# Altium PCB SINGLE_BOARD.PcbDoc
Units mm, origin at the board's own origin, x right, y up, seen from the top; angles counter-clockwise.
Board outline 48.01 x 205.2 mm, 4 copper layers (Top Layer 1, PWR, GND_LAYER, Bottom Layer), stack 0.602 mm thick; 33 components, 61 nets, 219 pads, 45 vias.
Unrouted connection lines stored in the file: 1.
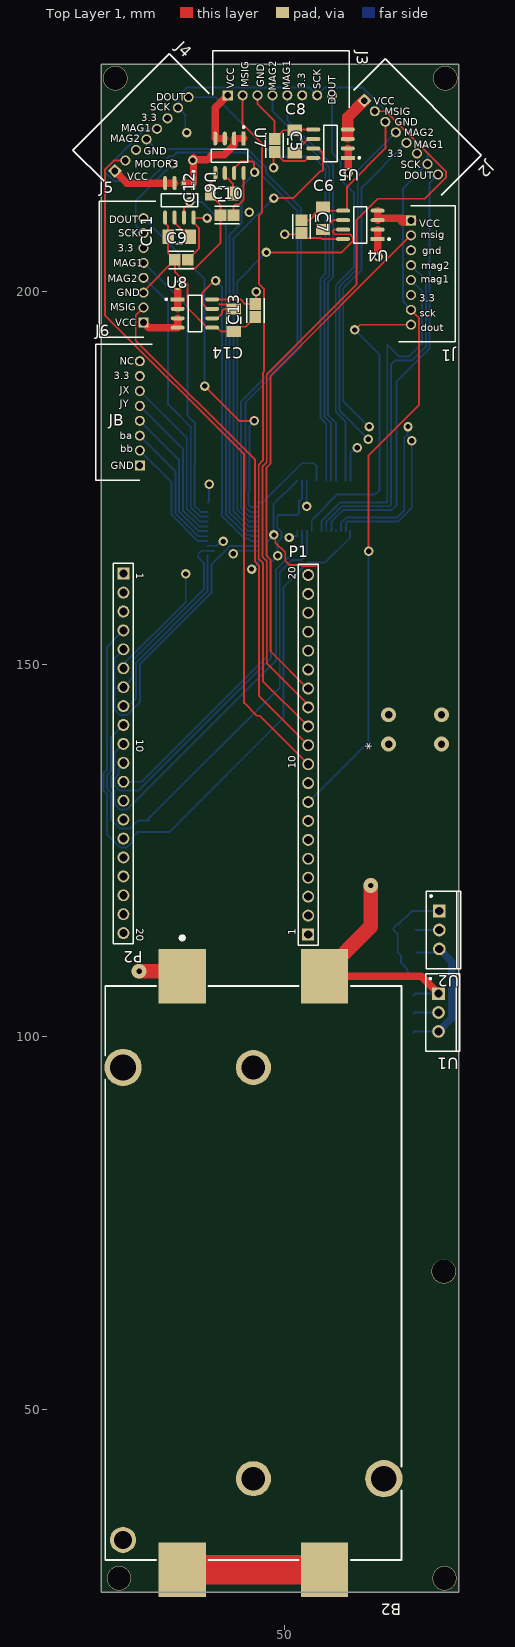
[diagram p0: Top Layer 1 view]
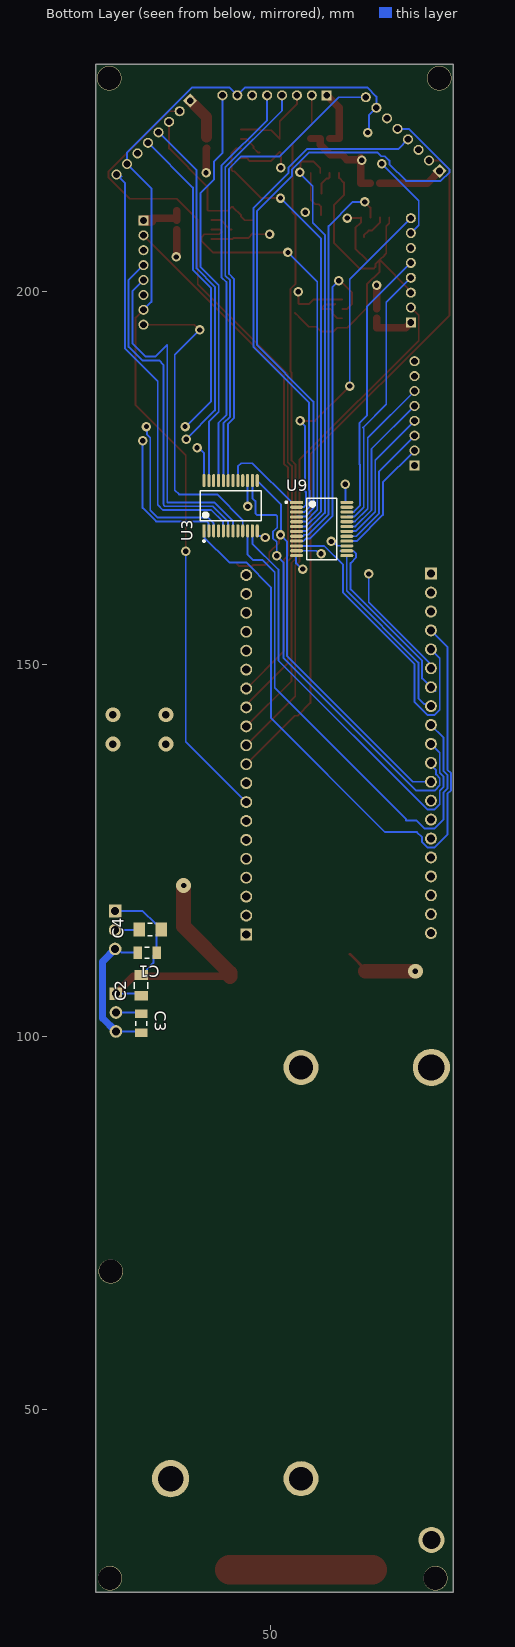
[diagram p1: Bottom Layer view, seen from below]
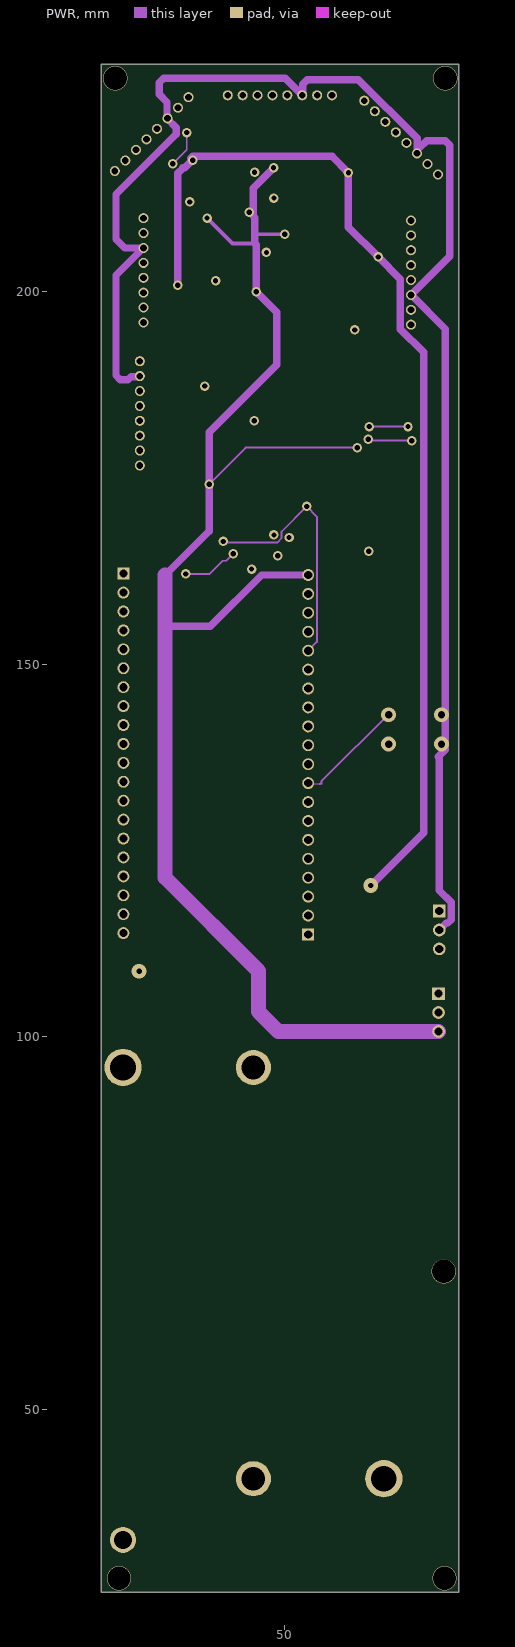
[diagram p2: PWR]
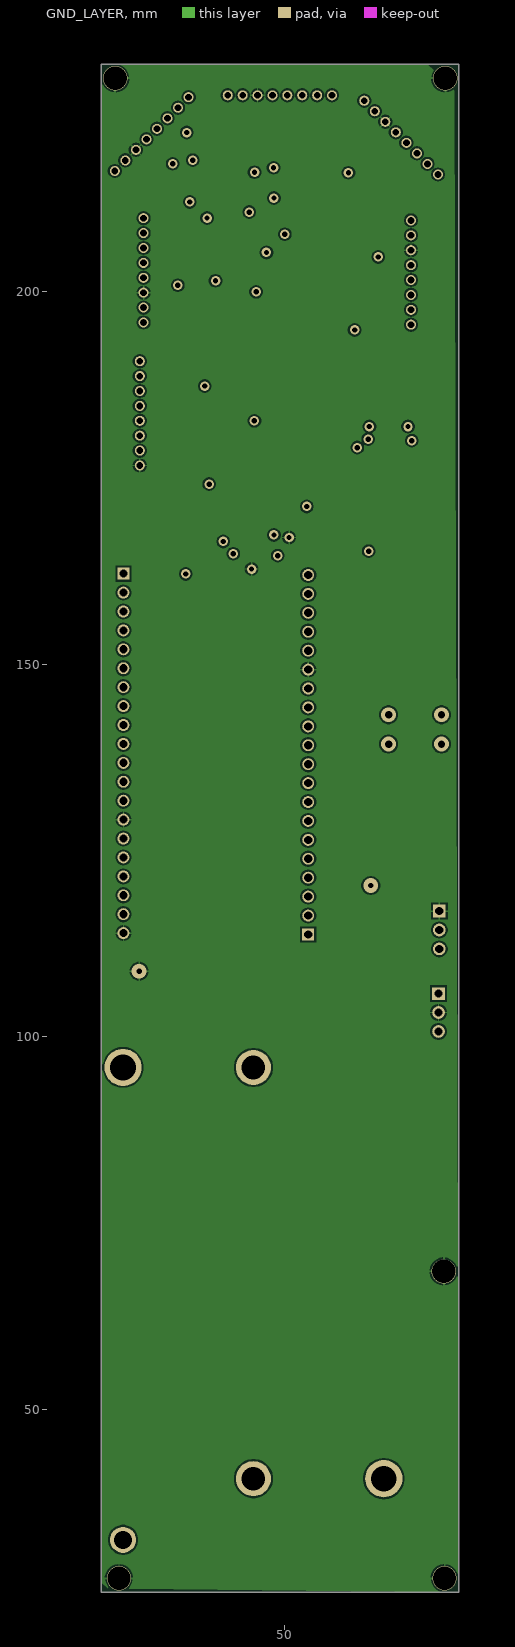
[diagram p3: GND_LAYER]
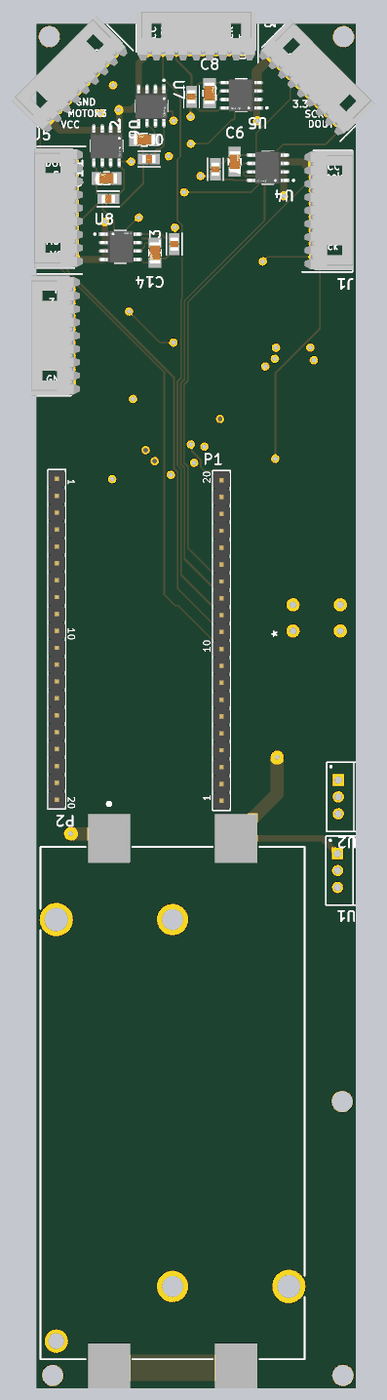
[diagram p4: 3D render of the assembled board from above, using the file's embedded part models]
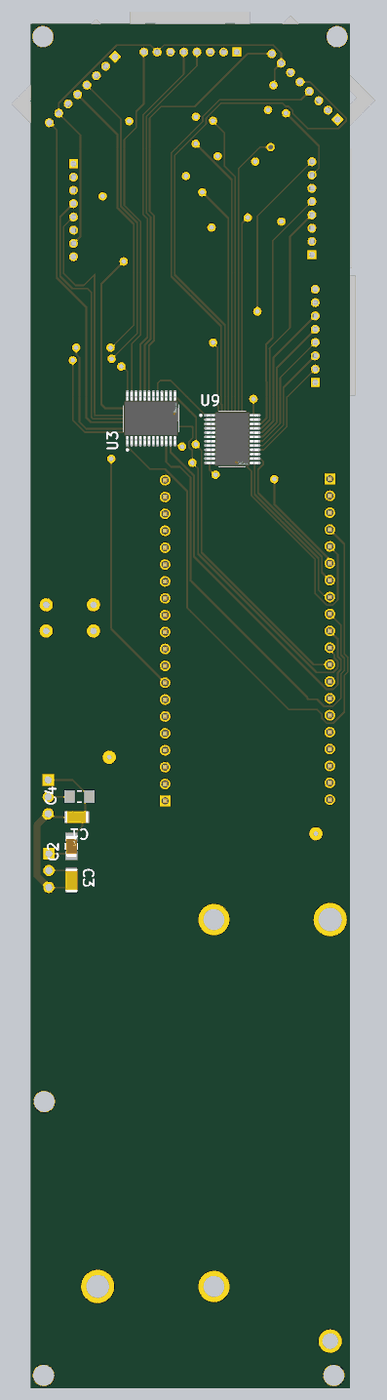
[diagram p5: 3D render of the assembled board from below, using the file's embedded part models]

## Layer stack, top to bottom
Top Solder: solder mask 0.0102, Solder Resist, Dk 3.5
Top Layer 1: signal copper 0.035
Dielectric 2: prepreg 0.0711, PP-006, Dk 4.1
PWR: signal copper 0.035
Dielectric 3: prepreg 0.0711, PP-006, Dk 4.1
GND_LAYER: signal copper 0.035
Dielectric 1: dielectric 0.32, FR-4, Dk 4.8
Bottom Layer: signal copper 0.035
Bottom Solder: solder mask 0.0102, Solder Resist, Dk 3.5

## Board outline
25.4,25.4 73.406,25.4 73.406,230.6 25.4,230.6

## Design rules (kind name [scope] priority, off if disabled: settings)
Clearance [All] p1: gap=0.254 ignorepadtopadclearanceinfootprint=FALSE except(0: Arc-Hole Track-Hole SMDPad-Hole THPad-Hole Via-Hole Fill-Hole Poly-Hole Region-Hole Text-Hole)
PolygonConnect [All] p1: connectstyle=Relief reliefconductorwidth=0.254 reliefentries=4 polygonreliefangle="90 Angle" airgapwidth=0.254
RoomDefinition U_power_esp32 [InComponentClass('U_power_esp32')] p1: confinementstyle=ConfineIn formatcopy=TRUE lockcomponents=FALSE outline 74.5,26.9 81,26.9 81,38.6 74.5,38.6
RoomDefinition "U_PIN HEADERS" [InComponentClass('U_PIN HEADERS')] p2: confinementstyle=ConfineIn formatcopy=TRUE lockcomponents=FALSE outline 0,0 50.8,0 50.8,25.4 0,25.4
RoomDefinition U_tactile_power [InComponentClass('U_tactile_power')] p3: confinementstyle=ConfineIn formatcopy=TRUE lockcomponents=FALSE outline 25.4,25.1 75,25.1 75,121 25.4,121
RoutingVias [All] p1: holewidth=0.711 width=1.27 viastyle="Through Hole" minholewidth=0.711 minwidth=1.27 maxholewidth=0.711 maxwidth=1.27
SolderMaskExpansion [All] p1: expansion=0.102 istentingtop=FALSE
Width [All] p1: maxlimit=4 minlimit=0.254 preferedwidth=0.254 bottomlayer_maxwidth=1 minimp=50.000000 maximp=50.000000 favimp=50.000000
30 further rules are at their usual default settings.

## Classes and differential pairs
component class U_tactile_power: B2 C1 C2 C3 C4 U1 U2
component class "U_PIN HEADERS": C5 C6 C7 C8 C9 C10 C11 C12 C13 C14 J1 J2 J3 J4 J5 J6 U4 U5 U6 U7 U8
component class U_power_esp32: * P1 P2 U3 U9

## Components (designator, comment, footprint, x,y, rotation, side; value= is the part's Value field where it differs from the comment)
* "12.5mm button" "12.5mm button-Footprint-1" 71.1,139.3 r90 top
B2 "1048" 1048 28.342,95.885 r270 top
C1 "GRM31C5C1E104JA01L" CAPC3216X180X55LL20T25 66.5,111.3 r0 bottom
C2 "330nf" FP-1206-L_3_2_0_2-W_1_6_0-IPC_B 67.3,106.9 r90 bottom
C3 "GRM31C5C1E104JA01L" CAPC3216X180X55LL20T25 67.3,101.8 r270 bottom
C4 "GRM31CR61E106KA12L" CAPC3216X180X55ML20T25 66.1,114.4 r0 bottom
C5 "C2012X5R1E105K125AA" FP-C2012-125-0_2-IPC_A 48.7,219.664 r270 top
C6 "12065C472KAT2A" FP-1206-L_3_2_0_2-W_1_6_0-IPC_A 55.2,209.9 r90 top
C7 "C2012X5R1E105K125AA" FP-C2012-125-0_2-IPC_A 52.3,208.764 r270 top
C8 "12065C472KAT2A" FP-1206-L_3_2_0_2-W_1_6_0-IPC_A 51.4,220.2 r90 top
C9 "C2012X5R1E105K125AA" FP-C2012-125-0_2-IPC_A 36.164,204.3 r0 top
C10 "C2012X5R1E105K125AA" FP-C2012-125-0_2-IPC_A 42.3,210.3 r0 top
C11 "12065C472KAT2A" FP-1206-L_3_2_0_2-W_1_6_0-IPC_A 35.901,207.4 r180 top
C12 "12065C472KAT2A" FP-1206-L_3_2_0_2-W_1_6_0-IPC_A 41.6,213.2 r180 top
C13 "C2012X5R1E105K125AA" FP-C2012-125-0_2-IPC_A 46.1,197.5 r90 top
C14 "12065C472KAT2A" FP-1206-L_3_2_0_2-W_1_6_0-IPC_A 43.2,196.2 r270 top
J1 "53254-0870" SHDRRA8W50P0X200_1X8_1800X730X440P 67,209.6 r270 top
J2 "53254-0870" SHDRRA8W50P0X200_1X8_1800X730X440P 60.729,225.671 r315 top
J3 "53254-0870" SHDRRA8W50P0X200_1X8_1800X730X440P 42.4,226.4 r0 top
J4 "53254-0870" SHDRRA8W50P0X200_1X8_1800X730X440P 27.243,216.243 r45 top
J5 "53254-0870" SHDRRA8W50P0X200_1X8_1800X730X440P 31.1,195.9 r90 top
J6 "53254-0870" SHDRRA8W50P0X200_1X8_1800X730X440P 30.6,176.7 r90 top
P1 "61302011121" 61302011121 53.2,137.87 r90 top
P2 "61302011121" 61302011121 28.4,138.05 r270 top
U1 "L7805CV" TO220 70.7,103.26 r270 top
U2 "LD1117V33" TO220 70.8,114.34 r270 top
U3 "CD74HC4067SM96" FP-DB0024A-IPC_C 55.3,171.3 r90 bottom
U4 "ACS724LLCTR-05AB-T" FP-LCN-8-IPC_C 60.2,209 r180 top
U5 "ACS724LLCTR-05AB-T" FP-LCN-8-IPC_C 56.2,219.9 r180 top
U6 "ACS724LLCTR-05AB-T" FP-LCN-8-IPC_C 35.9,212.3 r270 top
U7 "ACS724LLCTR-05AB-T" FP-LCN-8-IPC_C 42.635,218.284 r270 top
U8 "ACS724LLCTR-05AB-T" FP-LCN-8-IPC_C 38,197.1 r0 top
U9 "CD74HC4067SM96" FP-DB0024A-IPC_C 43.075,168.175 r180 bottom

## Footprints (in the part's own frame and the unit in brackets; to place one, negate y for a bottom-side part, rotate by r counter-clockwise, add the part's x,y. Pads: shape width x height; smd on the part's side, far side on the other; paste and mask are expansions set on the pad)
"12.5mm button-Footprint-1" [mm]
1048 [mm]
  rect 7.34x6.35 smd: 1(-12.225,7.95) 2(67.425,7.95) 3(67.425,27.06) 4(-12.225,27.06)
  round 4.7 hole 3.17: 5(0,17.505) 7(55.2,17.505)
  round 5 hole 3.54: 6(0,0)
  round 3.5 hole 2.39: 8(63.42,0)
  round 5 hole 3.45: 9(55.2,35.01)
  silkscreen extent -17.62,-2.38 66.13,37.4
61302011121 [mm] "Pin Header, pitch 2.54 mm, THT, Vertical, single row, 20p"
  rect 1.6x1.6 hole 1.1: 1(-24.13,0)
  round 1.6 hole 1.1: 2(-21.59,0) 3(-19.05,0) 4(-16.51,0) 5(-13.97,0) 6(-11.43,0) 7(-8.89,0) 8(-6.35,0) 9(-3.81,0) 10(-1.27,0) 11(1.27,0) 12(3.81,0) 13(6.35,0) 14(8.89,0) 15(11.43,0) 16(13.97,0) 17(16.51,0) 18(19.05,0) 19(21.59,0) 20(24.13,0)
  silkscreen extent -25.55,-1.35 25.55,1.35, body extent -25.4,-1.27 25.4,1.27, height 8.57
CAPC3216X180X55LL20T25 [mm] "Chip Capacitor, 2-Leads, Body 3.4x1.8mm, IPC High Density"
  rect 1.15x1.7 smd: 1(-1.275,0) 2(1.275,0)
  silkscreen extent -0.3,-0.75 0.3,0.75, body extent -1.7,-0.9 1.7,0.9, height 1.8
CAPC3216X180X55ML20T25 [mm] "Chip Capacitor, 2-Leads, Body 3.4x1.8mm, IPC Low Density"
  rect 1.55x1.9 smd: 1(-1.475,0) 2(1.475,0)
  silkscreen extent -0.3,-0.85 0.3,0.85, body extent -1.7,-0.9 1.7,0.9, height 1.8
FP-1206-L_3_2_0_2-W_1_6_0-IPC_A [mm]
  rect 1.505x1.906 smd paste+0 mask+0: 1(-1.501,0) 2(1.501,0)
  silkscreen extent -0.45,-0.95 0.45,0.95, body extent -2.75,-1.45 2.75,1.45, height 0.25
FP-1206-L_3_2_0_2-W_1_6_0-IPC_B [mm]
  rect 1.305x1.806 smd paste+0 mask+0: 1(-1.401,0) 2(1.401,0)
  silkscreen extent -0.45,-0.9 0.45,0.9, body extent -1.6,-0.8 1.6,0.8, height 1.52
FP-C2012-125-0_2-IPC_A [mm]
  rect 1.578x1.556 smd paste+0 mask+0: 1(-0.864,0) 2(0.864,0)
  silkscreen extent -1.65,-1.18 1.65,1.18, body extent -2.15,-1.28 2.15,1.28, height 0.25
FP-DB0024A-IPC_C [mm]
  rect 1.753x0.415 smd paste+0 mask+0: 1(-3.375,3.575)
  rrect100% 1.753x0.415 smd paste+0 mask+0: 2(-3.375,2.925) 3(-3.375,2.275) 4(-3.375,1.625) 5(-3.375,0.975) 6(-3.375,0.325) 7(-3.375,-0.325) 8(-3.375,-0.975) 9(-3.375,-1.625) 10(-3.375,-2.275) 11(-3.375,-2.925) 12(-3.375,-3.575) 13(3.375,-3.575) 14(3.375,-2.925) 15(3.375,-2.275) 16(3.375,-1.625) 17(3.375,-0.975) 18(3.375,-0.325) 19(3.375,0.325) 20(3.375,0.975) 21(3.375,1.625) 22(3.375,2.275) 23(3.375,2.925) 24(3.375,3.575)
  silkscreen extent -4.88,-4.1 2,4.1, body extent -3.9,-4.1 3.9,4.1, height 2
FP-LCN-8-IPC_C [mm]
  rect 1.874x0.542 smd paste+0 mask+0: 1(-2.316,1.905)
  rrect100% 1.874x0.542 smd paste+0 mask+0: 2(-2.316,0.635) 3(-2.316,-0.635) 4(-2.316,-1.905) 5(2.316,-1.905) 6(2.316,-0.635) 7(2.316,0.635) 8(2.316,1.905)
  silkscreen extent -3.98,-2.45 0.88,2.45, body extent -3.35,-2.55 3.35,2.55, height 0.25
SHDRRA8W50P0X200_1X8_1800X730X440P [mm]
  rect 1.35x1.35 / inner round 1.35 / far side rect 1.35x1.35 hole 0.9: 1(0,0)
  round 1.35 hole 0.9: 2(2,0) 3(4,0) 4(6,0) 5(8,0) 6(10,0) 7(12,0) 8(14,0)
  silkscreen extent -2,-1.65 16.3,5.95, body extent -10,-3.38 10,3.38, height 5.8
TO220 [mm] "TO, Thru-Hole, Vertical, Heatsink Mounted; 3 In-Line Leads; Pitch 2.54 mm"
  rect 1.7x1.7 hole 1.1: 1(-2.54,0)
  round 1.7 hole 1.1: 2(0,0) 3(2.54,0)
  silkscreen extent -5.2,-1.75 5.2,2.85, body extent -5.25,-1.8 5.25,2.9, height 19.7

## Part data
*: library part CMP-00027-1, "Spacer, Round, 1/4 Inch O.D., 1/4 Inch Long, #8 Hole, Phenolic", Actuator Type=Standard, Mount="Through Hole", Series=-, Termination="PC Pin", Throw Configuration=SPST
B2: library part CMP-003-000009-1, "KEYSTONE - 1048 - BATTERY HOLDER, 18650 LI-ION, 2CELL, SMD", Manufacturer_Name="Keystone Electronics", Mouser Part Number=534-1048, Datasheet Link=http://www.keyelco.com/product-pdf.cfm?p=920, Design Item ID=1048, Manufacturer_Part_Number=1048, Mouser Price/Stock=https://www.mouser.co.uk/ProductDetail/Keystone-Electronics/1048?qs=%2F7TOpeL5Mz5jXkg8vI8Dyw%3D%3D, Source=1048.SchLib
C1 C3: library part CMP-2000-06343-1, "Chip Capacitor, 100 nF, +/- 5%, 25 V, -55 to 125 degC, 1206 (3216 Metric), RoHS, Tape and Reel", Capacitance=0.1µF, Capacitance Tolerance=±5%, Capacitor Case Style=1206[3216Metric], Capacitor Terminals=SMD, Dielectric Characteristic=C0G/NP0, Insulation Resistance=10000Mohm, Manufacturer=Murata, Operating Temperature Max=125°C, Operating Temperature Min=-55°C, Operating Temperature Range=-55°Cto+125°C, Package / Case=1206, Package Description="2-Pin Surface Mount Device, Body 3.2 x 1.6 mm", Temperature Coefficient=0ppm/°C±30ppm/°C, Tolerance +=5%, Voltage Rating=25V, Datasheet URL=https://datasheet.ciiva.com/3777/11308grm31c5c1e104ja0123-3777177.pdf, Datasheet Version=09/2014, External Length / Height=1mm, External Width=0.5mm, Lead Spacing=–, Manufacturer URL=http://www.murata.com/, Mounting Technology=SurfaceMount, MSL=–, No. of Pins=2, Package Reference=1206, Reel Quantity=2000, SVHC=NoSVHC(19-Dec-2012), Terminal Type=SurfaceMount(SMD,SMT), Tolerance -=5%, Voltage Rating V DC=25V
C2: library part CMP-2000-05868-2, "General Purpose Ceramic Capacitor, 1206, 330nF, 10%, X7R, 15%, 50V", Capacitance=330nF, Case Code (Imperial)=1206, Case Code (Metric)=3216, Dielectric=X7R, Dielectric Material=Ceramic, Insulation Resistance=100GR, Max Operating Temperature=125°C, Min Operating Temperature=-55°C, Package Quantity=1, Tolerance=10%, Voltage=25V, Voltage Rating=50V, Case/Package=1206, Construction=Flat, Contact Plating=Tin, Depth=1.6mm, Dissipation Factor=2.5%, Height=1.52mm, Lead Free="Lead Free", Length=3.2mm, Mount="Surface Mount", Number of Pins=2, Packaging="Tape and Reel", Radiation Hardening=No, REACH SVHC="No SVHC", RoHS Compliant=Yes, Series=1206, Termination=SMD/SMT, Thickness=0.06inch, Voltage Rating (DC)=50V, Width=1.6mm
C4: library part CMP-2000-04947-1, "Chip Capacitor, 10 uF, +/- 10%, 25 V, -55 to 85 degC, 1206 (3216 Metric), RoHS, Tape and Reel", Capacitance=10uF, Case Code - in=1206, Case Code - mm=3216, Case Height=1.6mm, Case Length=3.2mm, Dielectric=X5R, Manufacturer=Murata, Maximum Operating Temperature=+85C, Minimum Operating Temperature=-55C, Package / Case=1206(3216metric), Package Description="2-Pin Surface Mount Device, Body 3.2 x 1.6 mm", Tolerance=10%, Voltage Rating DC=25V, Brand=MurataElectronics, Case Width=1.6mm, Datasheet URL=https://datasheet.ciiva.com/11786/0900766b80ef921d-11786983.pdf, Datasheet Version=Sep-13, Factory Pack Quantity=2000, Manufacturer URL=http://www.murata.com/, Package Reference=1206, Packaging=Reel, Product=GeneralTypeMLCCs, Product Category=MultilayerCeramicCapacitorsMLCC-SMD/SMT, RoHS=Details, Series=GRM, Termination Style=SMD/SMT, Type=GeneralPurposeMLCC
C5 C7 C9 C10 C13: library part CMP-08246-005389-1, "Multilayer Ceramic Capacitors 1μF ±10% 25V X5R SMD 0805", Capacitance=1uF, Case Code (Imperial)=0805, Case Code (Metric)=2012, Dielectric=X5R, Dielectric Material=Ceramic, Max Operating Temperature=85°C, Min Operating Temperature=-55°C, Package Quantity=2000, Tolerance=10%, Voltage=25V, Case/Package=0805, Construction=Flat, Depth=1.25mm, Height=1.25mm, Lead Free="Lead Free", Length=2mm, Mount="Surface Mount", Number of Pins=2, Packaging="Tape and Reel", Radiation Hardening=No, REACH SVHC="No SVHC", Resistor Type=Ceramic, RoHS Compliant=Yes, Series=C, Termination=SMD/SMT, Thickness=0.057inch, Voltage Rating=25V, Voltage Rating (DC)=25V, Weight=0.000194oz, Width=0.049inch
C6 C8 C11 C12 C14: library part CMP-04427-019159-1, "General Purpose Ceramic Capacitor, 1206, 4.7nF, 10%, X7R, 15%, 50V", Capacitance=4.7nF, Case Code (Imperial)=1206, Case Code (Metric)=3216, Dielectric=X7R, Dielectric Material=Ceramic, Max Operating Temperature=125°C, Min Operating Temperature=-55°C, Package Quantity=1, Tolerance=10%, Voltage=50V, Case/Package=1206, Construction=Flat, Contact Plating=Tin, Depth=1.6mm, Dissipation Factor=2.5%, Height=0.94mm, Lead Free="Lead Free", Length=3.2mm, Mount="Surface Mount", Number of Pins=2, Packaging="Tape and Reel", Radiation Hardening=No, RoHS Compliant=Yes, Series=-, Termination=SMD/SMT, Thickness=0.037inch, Voltage Rating=50V, Voltage Rating (DC)=50V, Width=1.6mm
J1 J2 J3 J4 J5 J6: library part CMP-003-000027-1, "Headers & Wire Housings 8CKT WTB R/A", Manufacturer_Name=Molex, Mouser Part Number=538-53254-0870, Datasheet Link=https://componentsearchengine.com/Datasheets/2/53254-0870.pdf, Design Item ID=53254-0870, Geometry.Height=4.4mm, Manufacturer_Part_Number=53254-0870, Mouser Price/Stock=https://www.mouser.co.uk/ProductDetail/Molex/53254-0870?qs=s16%252Be%252B8QgeFQnKbK1eobMw%3D%3D, Source=53254-0870.SchLib
P1 P2: library part CMP-1502-01102-1, "THT Vertical Pin Header WR-PHD, Pitch 2.54 mm, Single Row, 20 pins", Contact Resistance=20mOhm, Manufacturer="Wurth Elektronik", Operating Temperature=-40to105degC, Rated Current=3A, Withstanding Voltage=500VAC, Working Voltage=250VAC, Datasheet URL=https://katalog.we-online.de/em/datasheet/6130xx11121.pdf, Gender=Male, Manufacturer URL=http://www.we-online.de, Mounting Technology=THT, Orientation=Vertical, Package Reference=61302011121, Packaging=Bag, Part Number=61302011121, Pin Number=20, Pitch=2.54mm, Publisher=WurthElektronik, Row Number=Single
U1: library part CMP-0244-00483-1, "Positive Voltage Regulator, 5V, 3-Pin TO-220", ComponentLink1Description="Manufacturer URL", ComponentLink1URL=http://www.st.com, ComponentLink2Description=Datasheet, ComponentLink2URL=http://www.st.com/internet/com/TECHNICAL_RESOURCES/TECHNICAL_LITERATURE/DATASHEET/CD00000444.pdf, ComponentLink3Description="Package Specification", ComponentLink3URL=http://www.st.com/internet/com/TECHNICAL_RESOURCES/TECHNICAL_LITERATURE/PACKAGE_INFORMATION/CD00004649.pdf, DatasheetVersion=16/11/2011, PackageDescription="TO, Thru-Hole, Vertical, Heatsink Mounted; 3 In-Line Leads; Pitch 2.54 mm", PackageReference=TO220, PackageVersion=ver3.0
U2: library part CMP-0244-00470-1, "Fixed Low Drop Positive Voltage Regulator, 3.3V, 3-Pin TO-220", ComponentLink1Description="Manufacturer URL", ComponentLink1URL=http://www.st.com, ComponentLink2Description=Datasheet, ComponentLink2URL=http://www.st.com/internet/com/TECHNICAL_RESOURCES/TECHNICAL_LITERATURE/DATASHEET/CD00000544.pdf, ComponentLink3Description="Package Specification", ComponentLink3URL=http://www.st.com/internet/com/TECHNICAL_RESOURCES/TECHNICAL_LITERATURE/PACKAGE_INFORMATION/CD00004649.pdf, DatasheetVersion=1/11/2011, PackageDescription="TO, Thru-Hole, Vertical, Heatsink Mounted; 3 In-Line Leads; Pitch 2.54 mm", PackageReference=TO220, PackageVersion=ver3.0
U3 U9: library part CMP-04892-000038-1, "IC MUX/DEMUX 1X16 24SSOP", Case/Package=SSOP, High Level Output Current=25mA, Max Operating Temperature=125°C, Max Supply Current=8uA, Max Supply Voltage=6V, Min Operating Temperature=-55°C, Min Supply Voltage=2V, On-State Resistance=160R, Package Quantity=2000, Bandwidth=89MHz, Contact Plating=Gold, Height=1.95mm, Lead Free="Lead Free", Length=8.2mm, Logic Function=Multiplexer, Low Level Output Current=25mA, Max Output Current=25mA, Mount="Surface Mount", Number of Bits=16, Number of Channels=1, Number of Circuits=16, Number of Inputs=16, Number of Outputs=1, Number of Pins=24, Operating Supply Current=8uA, Packaging="Tape and Reel", Polarity=Non-Inverting, Propagation Delay=75ns, Radiation Hardening=No, REACH SVHC="No SVHC", Series=74HC, Supply Type=Single, Termination=SMD/SMT, Turn-Off Delay Time=290ns, Turn-On Delay Time=300ns, Weight=0.006081oz, Width=5.3mm
U4 U5 U6 U7 U8: library part CMP-82923-000070-2, "SENSOR CURRENT HALL", Case/Package=SOIC, Current Sensing=5A, Frequency=120kHz, Max Operating Temperature=150°C, Max Supply Current=14mA, Min Operating Temperature=-40°C, Accuracy=0.6%, Linearity=1.5%, Mount="Surface Mount", Number of Channels=1, Packaging="Tape and Reel", Polarity=Bidirectional, Response Time=4us, RoHS Compliant=Yes, Sensitivity=400mV/A

## Via types
v1: diameter 1.27, hole 0.711, Top Layer 1 to Bottom Layer, 34 vias
v2: diameter 3.25, hole 3.15, Top Layer 1 to Bottom Layer, 5 vias
v3: diameter 2, hole 1, Top Layer 1 to Bottom Layer, 4 vias
v4: diameter 2, hole 0.711, Top Layer 1 to Bottom Layer, 2 vias

## Nets (pads, with @x,y where several pads share a name; then routed paths per layer and width w, separated by ;. In a path a pad name is that pad's centre, name@x,y a point inside that pad or via, vN(x,y) a via of type N, cw(c..) or ccw(c..) an arc to the next point about the centre after c; other vN are vias at no path point)
+3.3: C4.2 J1.6 J2.6 J3.6 J4.6 J5.6 J6.7 U2.2 | length 213.8
  PWR w0.254: 70.65,137.578 70.8,137.428
  PWR w1: J6.7 30.533,188.633 29.419,188.633 28.986,188.2 27.986,188.2 27.4,188.786 27.4,202.221 J5.6@31.079,205.9 ; J5.6 J5.6@31.079,205.9 ; J3.6 52.467,226.467 52.467,227.881 53.086,228.5 59.921,228.5 67.815,220.606 J2.6@67.815,218.615 ; J3.6@52.4,226.421 50.121,228.7 33.786,228.7 33.2,228.114 33.2,226.523 34.247,225.476 34.247,223.381 J4.6 34.314,223.22 35.5,222.034 35.5,221.2 27.4,213.1 27.4,207.086 28.586,205.9 J5.6@31.079,205.9 ; J1.6 J1.6@67.021,199.6 ; 68.2,219.4 69.1,220.3 71.614,220.3 72.2,219.714 72.2,204.779 J1.6@67.021,199.6 ; 70.65,137.578 71.6,138.528 71.6,195.021 J1.6@67.021,199.6 ; U2.2 71.736,115.276 71.962,115.276 72.404,115.718 72.404,118.042 70.8,119.646 70.8,137.428
  Bottom Layer w0.254: C4.2 67.635,114.34 U2.2
+5: C1.2 C3.2 C5.2 C7.2 C9.2 C10.2 C13.2 P1.20 U1.3 U2.3 U3.24 U4.8 U5.8 U6.8 U7.8 U8.8 U9.24 | length 275.3
  Top Layer 1 w0.254: C9.2 37.039,204.3 38.535,205.796 38.535,208.588 37.805,209.318 U6.8 37.868,209.921 v1(39.627,209.921) ; U8.8 44.14,199.005 44.781,198.364 C13.2 46.209,198.473 v1(46.209,200.011) ; C10.2 43.164,211.459 43.479,211.774 43.919,211.774 44.54,212.395 U7.8 ; v1(48.556,216.664) 48.556,218.645 48.7,218.789 49.922,217.567 52.724,217.567 53.152,217.995 U5.8 ; v1(50.068,207.751) 52.151,207.751 C7.2 52.3,207.889 52.951,207.238 54.947,207.238 55.089,207.095 U4.8
  PWR w0.254: v1(39.9,174.2) 44.8,179.1 v1(59.8,179.1) ; v1(45.282,210.718) 45.8,210.2 46.051,209.949
  PWR w0.5: v1(39.627,209.921) 43.048,206.5 46.051,206.5 ; 46.051,207.751 v1(50.068,207.751)
  PWR w1: 34,155.1 40.069,155.1 46.969,162 P1.20 ; 34,162 39.9,167.9 v1(39.9,174.2) 39.9,181.181 48.962,190.244 48.962,197.258 46.288,199.932 v1@46.13,199.932 ; v1(45.282,210.718) v1@45.8,210.718 ; 45.8,210.2 v1@45.8,210.718 ; 46.051,209.949 46.051,207.751 46.051,206.5 46.209,206.342 v1(46.209,200.011) ; v1(48.556,216.664) 45.8,213.908 v1@45.8,210.718
  PWR w2: 34,162 34,155.1 34,121.36 46.523,108.837 46.523,103.377 49.18,100.72 U1.3
  Bottom Layer w0.254: U9.24 39.826,171.75 39.9,171.824 v1(39.9,174.2) ; U3.24 58.887,174.688 58.887,178.396 59.591,179.1 v1(59.8,179.1) ; C3.2 67.495,100.72 U1.3 ; C1.2 69.909,111.3 70.409,111.8 U2.3
  Bottom Layer w1: U1.3 72.5,102.52 72.5,110.1 U2.3
BUTTON_A: J6.3 U9.17 | length 18
  Bottom Layer w0.254: J6.3 35.368,175.932 35.368,170.27 38.438,167.2 U9.17
BUTTON_B: J6.2 U9.16 | length 16.7
  Bottom Layer w0.254: J6.2 34.86,174.44 34.86,170.06 38.37,166.55 U9.16
CONFIG_BUTTON: U3.16
CURRENT_SENSOR_0: U8.7 U9.9 | length 43.7
  Top Layer 1 w0.254: U8.7 39.65,197.735 38.998,198.387 38.998,199.898 40.6,201.5 40.762,201.5 v1(40.763,201.499)
  Bottom Layer w0.254: v1(40.763,201.499) 41.637,200.625 41.637,169.912 44.653,166.896 45.185,166.896 45.5,166.581 46.419,166.581 U9.9
CURRENT_SENSOR_1: U6.7 U9.8 | length 52.8
  Top Layer 1 w0.254: U6.7 36.535,211.31 v1(37.31,212.084)
  Bottom Layer w0.254: v1(37.31,212.084) 38.901,212.084 42.145,208.84 42.145,170.122 44.864,167.404 45.396,167.404 45.568,167.231 46.419,167.231 U9.8
CURRENT_SENSOR_2: U7.7 U9.7 | length 57
  Top Layer 1 w0.254: U7.7 43.27,216.634 44.136,217.5 45.751,217.5 45.9,217.351 45.9,216.165 v1(45.997,216.069)
  Bottom Layer w0.254: v1(45.997,216.069) 45.997,215.943 44.266,214.212 44.266,209.261 42.653,207.648 42.653,170.333 45.074,167.912 45.606,167.912 45.637,167.881 46.419,167.881 U9.7
CURRENT_SENSOR_3: U5.7 U9.6 | length 60.2
  Top Layer 1 w0.254: v1(48.6,212.6) 51.188,212.6 54.788,216.2 55,216.2 55.202,216.402 55.202,218.613 54.55,219.265 U5.7
  Bottom Layer w0.254: U9.6 46.439,168.511 45.193,168.511 43.161,170.543 43.161,207.161 v1@48.45,212.45
CURRENT_SENSOR_4: U4.7 U9.5 | length 57
  Top Layer 1 w0.254: v1(47.598,205.3) 57.677,205.3 59.202,206.825 59.202,207.365 58.82,207.747 56.793,207.747 56.534,208.006 56.534,208.216 56.683,208.365 U4.7
  Bottom Layer w0.254: U9.5 46.419,169.181 45.242,169.181 43.669,170.753 43.669,201.371 v1(47.598,205.3)
dout: J1.7 J2.7 J3.7 J4.7 J5.7 P1.8 | length 156.2
  Top Layer 1 w0.254: v1(61.315,165.202) 61.315,178.073 68.056,184.814 68.056,196.544 J1.7
  PWR w0.254: v1(35,217.2) 36.889,219.089 v1(36.889,221.4)
  Bottom Layer w0.254: J5.7 30.044,208.956 30.044,212.244 v1(35,217.2) ; v1(36.889,221.4) 36.7,221.4 36.7,223.757 J4.7 35.728,226.222 36.963,227.456 53.344,227.456 J3.7 55.456,227.456 60.437,227.456 69.214,218.679 J2.7 65.944,213.916 65.944,198.656 J1.7 ; P1.8 61.315,139.635 v1(61.315,165.202)
E: P1.16 U3.15 U9.15 | length 40.2
  Top Layer 1 w0.254: v1@52.898,171.2 v1(53,171.2)
  PWR w0.254: v1(41.8,166.5) 41.941,166.359 49.021,166.359 49.616,166.954 49.616,167.816 v1(53,171.2) 54.381,169.819 54.381,153.021 P1.16
  Bottom Layer w0.254: U9.15@39.669,165.869 U9.15 39.731,165.931 40.956,165.931 41.525,166.5 v1(41.8,166.5) ; v1(53,171.2) 53.013,171.212 53.013,174.663 U3.15
GND: B2.1 C1.1 C2.2 C3.1 C4.1 C5.1 C6.2 C7.1 C8.2 C9.1 C10.1 C11.2 C12.2 C13.1 C14.2 J1.3 J2.3 J3.3 J4.3 J5.3 J6.1 P1.15 P2.14 P2.20 U1.2 U2.1 U3.12 U4.5 U5.5 U6.5 U7.5 U8.5 U9.12 | length 116.8
  Top Layer 1 w0.254: J5.3 31.1,200.111 35.289,204.3 34.638,204.951 34.638,204.962 34.4,205.2 C11.2 34.4,208.835 33.995,209.24 U6.5 ; C9.1 C9.1@35.3,204.289 ; U7.5 40.73,215.302 40.099,214.671 C12.2 40.099,212.999 41.436,211.662 C10.1 41.436,206.602 37.975,203.141 36.081,203.141 35.858,203.364 35.858,203.731 C9.1@35.3,204.289 ; J3.3 46.4,225.2 48.7,222.9 C5.1@48.7,220.539 ; C13.1@46.658,197.194 C13.1 46.1,196.625 44.8,195.325 43.825,195.325 C14.2 41.478,194.699 40.982,195.195 U8.5 39.65,195.195 37.002,197.843 37.002,201.035 35.3,202.737 C9.1@35.3,204.289 ; C5.1 C5.1@48.7,220.539 ; C7.1 53.427,209.628 53.901,210.101 53.901,210.302 54.999,211.401 C6.2 55.696,210.905 U4.5 58.29,210.905 58.423,211.038 58.423,214.134 63.557,219.268 J2.3 ; U5.5 51.403,221.805 51.3,221.702 49.863,221.702 C5.1@48.7,220.539
  Top Layer 1 w0.381: B2.1 36.982,108.8 B2.1@39.277,111.094
  Top Layer 1 w2: v4(30.5,108.8) 36.982,108.8 B2.1@37.2,108.8
  Bottom Layer w0.254: v1(45.6,162.8) 45.733,162.8 46.5,163.567 46.5,164.526 46.45,164.575 U9.12 ; v1(50.632,167.032) 50.825,167.225 51.651,167.225 51.725,167.299 U3.12 ; C3.1 67.485,103.26 U1.2 ; C2.2 67.049,108.301 66.524,108.826 66.524,109.077 65.673,109.928 65.673,110.852 C1.1 65.225,113.8 C4.1 64.625,114.575 65.273,115.223 65.448,115.223 67.105,116.88 U2.1
  other v2: 27.8,27.3 71.5,27.3 71.4,68.5 27.3,228.7 71.6,228.7
I2C_CLK: P2.15
I2C_SDA: P2.18
JOY_BUTTON: J6.4 U9.18 | length 19.3
  Bottom Layer w0.254: J6.4 35.876,177.424 35.876,170.481 38.476,167.881 39.669,167.881 U9.18
JOY_X: J6.6 U9.20 | length 21.9
  Bottom Layer w0.254: J6.6 36.892,180.408 36.892,170.901 38.613,169.181 39.669,169.181 U9.20
JOY_Y: J6.5 U9.19 | length 20.6
  Bottom Layer w0.254: J6.5 36.384,178.916 36.384,170.691 38.544,168.531 39.669,168.531 U9.19
MAG_1_1: J1.5 U3.7 | length 47.5
  Bottom Layer w0.254: U3.7 54.975,169.24 57.477,171.741 63.799,171.741 63.799,172.08 63.808,172.09 63.808,192.91 65.41,191.308 66.692,191.308 68.484,193.1 68.484,200.116 J1.5
MAG_1_2: J1.4 U3.6 | length 47.1
  Bottom Layer w0.254: U3.6 55.625,169.171 57.687,171.233 64.127,171.233 64.276,171.382 64.276,171.5 64.307,171.531 64.307,171.87 64.316,171.879 64.316,190.216 64.9,190.8 67.169,190.8 68.992,192.623 68.992,201.608 J1.4
MAG_2_1: J2.5 U3.3 | length 70
  PWR w0.254: v1(61.416,181.922) v1(66.6,181.922)
  Bottom Layer w0.254: U3.3 57.606,167.956 57.606,168.997 58.318,169.709 65.091,169.709 66.092,170.71 66.092,180.454 66.544,180.906 66.544,181.865 v1(66.6,181.922) ; v1(61.416,181.922) 61.321,181.922 57.909,185.334 57.909,200.494 60.367,202.952 60.367,213.995 J2.5
MAG_2_2: J2.4 U3.2 | length 71.6
  PWR w0.254: v1(61.251,180.243) 61.461,180.033 v1(67.108,180.033)
  Bottom Layer w0.254: U3.2 58.256,167.956 58.256,168.928 58.527,169.2 65.3,169.2 67.108,171.008 v1(67.108,180.033) ; v1(61.251,180.243) 57.401,184.094 57.401,200.704 59.859,203.162 59.859,216.316 J2.4
MAG_3_1: J3.5 U3.21 | length 55
  Bottom Layer w0.254: J3.5 50.4,223.074 56.532,216.942 56.532,201.99 55.877,201.335 55.877,183.462 56.925,182.414 U3.21
MAG_3_2: J3.4 U3.20 | length 55.5
  Bottom Layer w0.254: J3.4 48.4,224.355 56.024,216.731 56.024,202.201 55.369,201.546 55.369,183.252 56.275,182.346 U3.20
MAG_4_1: J4.5 U9.4 | length 87.3
  Bottom Layer w0.254: J4.5 31.407,221.9 25.908,216.401 25.908,216.085 27.085,214.908 31.738,214.908 33.984,217.153 33.984,217.621 34.579,218.216 35.047,218.216 35.539,218.708 44.794,218.708 47.032,216.47 47.032,215.605 51.741,210.896 51.741,192.841 44.177,185.277 44.177,170.964 45.31,169.831 46.419,169.831 U9.4
MAG_4_2: J4.4 U9.3 | length 70.3
  Bottom Layer w0.254: J4.4 32.756,219.216 45.005,219.216 47.54,216.681 47.54,215.962 52.249,211.254 52.249,192.63 44.792,185.174 44.792,173.441 44.685,173.334 44.685,171.174 45.378,170.481 46.419,170.481 U9.3
MAG_5_1: J5.5 U9.22 | length 37.6
  Bottom Layer w0.254: J5.5 37,198 37,183.4 38.008,182.392 38.008,176.881 37.935,176.807 37.935,171.296 38.75,170.481 39.669,170.481 U9.22
MAG_5_2: J5.4 U9.21 | length 36.3
  Bottom Layer w0.254: J5.4 34.405,198.595 34.405,184.895 37.5,181.8 37.427,181.727 37.427,171.085 38.681,169.831 39.669,169.831 U9.21
MOTOR_0: J1.2 P1.14 | length 71.4
  Top Layer 1 w0.254: P1.14@53.3,146.6 48.14,151.76 48.14,164.063 47.584,164.619 47.584,176.401 48.14,176.957 48.14,188.74 J1.2
MOTOR_1: J2.2 P1.13 | length 101.3
  Top Layer 1 w0.254: P1.13 53.2,144.584 47.632,150.152 47.632,163.852 47.076,164.408 47.076,176.612 47.632,177.168 47.632,188.95 59.71,201.028 59.71,209.687 62.534,212.511 68.861,212.511 71.684,215.334 71.684,216.209 63.637,224.257 J2.2
MOTOR_2: J3.2 P1.12 | length 89.3
  Top Layer 1 w0.254: J3.2 44.4,222.487 47.013,219.874 47.013,210.69 46.582,210.259 46.582,201.075 47.259,200.398 47.259,189.296 47.124,189.161 47.124,177.378 46.568,176.822 46.568,164.198 47.124,163.642 47.124,147.756 P1.12
MOTOR_3: J4.2 P1.10 | length 94.6
  Top Layer 1 w0.254: J4.2 27.164,217.657 25.908,216.401 25.908,196.886 44.584,178.209 44.584,144.816 46.3,143.1 46.7,143.1 P1.10
MOTOR_4: J5.2 P1.11 | length 68.8
  Top Layer 1 w0.254: J5.2 30.044,196.844 30.044,193.468 46.06,177.452 46.06,163.777 46.616,163.221 46.616,145.724 P1.11
MUX_2_OUT: U3.17 U9.1 | length 12.1
  Bottom Layer w0.254: U9.1 47.119,171.75 52.369,177 53.9,177 54.325,176.575 U3.17
MUX_OUTPUT: P2.4 U3.1 | length 90.9
  Bottom Layer w0.254: P2.4 26.2,152.36 26.2,135.865 25.695,135.36 25.695,133.12 26.2,132.615 26.2,127.15 27.911,125.439 28.889,125.439 29.589,126.139 29.589,126.792 30.29,127.492 34.572,127.492 49.885,142.805 49.885,160.355 53.213,163.684 55.485,163.684 58.813,167.012 58.813,167.863 U3.1
Net*_3: P1.9 | length 2.1
  PWR w0.254: P1.9@53,134 53.196,133.99 54.706,133.91 55,134.175
NetB2_2: B2.2 B2.3 | length 19.1
  Top Layer 1 w4: B2.2 B2.3
NetC6_1: C6.1 U4.6 | length 3.2
  Top Layer 1 w0.254: C6.1 55.401,208.399 56.026,209.025 56.026,209.095 56.566,209.635 U4.6
NetC8_1: C8.1 U5.6 | length 3.4
  Top Layer 1 w0.254: C8.1 51.601,218.699 52.226,219.325 52.226,219.543 53.218,220.535 U5.6
NetC11_1: C11.1 U6.6 | length 3.7
  Top Layer 1 w0.254: U6.6 35.265,209.318 36.357,208.226 36.776,208.226 37.402,207.601 C11.1
NetC12_1: C12.1 U7.6 | length 3.4
  Top Layer 1 w0.254: U7.6 42,215.38 42.133,215.247 42.388,215.247 43.101,214.534 C12.1
NetC14_1: C14.1 U8.6 | length 5.8
  Top Layer 1 w0.254: U8.6 40.982,196.465 41.634,197.117 41.634,197.469 41.866,197.701 C14.1 42.575,198.326 41.313,198.326 41.269,198.37
NetP2_5: P2.5 U9.10 | length 43.1
  Bottom Layer w0.254: P2.5@28.689,152.309 P2.5 27.219,150.839 27.219,143.911 27.938,143.192 28.862,143.192 30.597,144.927 30.597,150.034 40.208,159.645 40.208,163.346 42.762,165.9 U9.10
NetP2_6: P2.6 U9.11 | length 27.6
  PWR w0.254: v1(36.755,162.145) 39.99,162.145 41.752,163.907 42.205,163.907 v1(43.152,164.853)
  Bottom Layer w0.254: P2.6@28.2,149.1 28.2,149.792 36.755,158.348 v1(36.755,162.145) ; v1(43.152,164.853) 43.427,164.853 43.823,165.25 U9.11 U9.11@46.419,165.219
NetP2_7: P2.7 U9.14 | length 25.8
  Bottom Layer w0.254: 27.8,146.4 28.37,146.97 28.43,146.97 29.581,148.121 29.581,150.455 39.192,160.066 39.192,163.607 38.443,164.356 38.443,164.844 38.787,165.188 38.926,165.188 38.988,165.25 U9.14 39.731,165.219 40.582,165.219
NetP2_8: P2.8 U9.13 | length 25
  Bottom Layer w0.254: P2.8@28.727,144.359 29.022,144.654 29.308,144.654 30.089,145.435 30.089,150.245 39.7,159.856 U9.13
NetP2_9: P2.9 U3.10 | length 68.2
  Bottom Layer w0.254: P2.9 26.708,140.168 26.708,135.655 26.203,135.15 26.203,133.33 26.708,132.825 26.708,129.182 27.911,127.979 29.3,127.979 30.366,129.045 31.755,129.045 31.755,129.255 49.377,146.877 49.377,162.377 51,164 52.29,164 53.025,164.735 U3.10
NetP2_10: P2.10 U3.11 | length 58.1
  Bottom Layer w0.254: P2.10 27.216,138.136 27.216,135.445 26.711,134.94 26.711,133.54 27.216,133.035 27.216,131.214 27.911,130.519 28.889,130.519 48.869,150.499 48.869,162.714 52.375,166.22 U3.11
NetP2_11: P2.11 U3.14 | length 59.7
  Bottom Layer w0.254: P2.11 28.4,136.462 27.724,135.786 27.724,135.234 27.219,134.729 27.219,133.751 27.911,133.059 30.375,133.059 48.216,150.9 48.216,163.716 v1(49.1,164.6) 49.1,166.438 49.616,166.954 49.616,167.796 49.237,168.175 49.044,168.367 49.044,169.895 49.193,170.044 51.744,170.044 51.984,170.284 51.984,171.912 52.375,172.303 U3.14
NetP2_12: P2.12 U3.13 | length 60.4
  Top Layer 1 w0.254: v1(48.6,167.375) 48.778,167.196 48.778,166.359 50.116,165.021 50.116,163.906 50.663,163.359 52.241,163.359 52.378,163.222 54.2,163.222 54.478,163.5
  Bottom Layer w0.254: P2.12 30.837,134.24 47.708,151.11 47.708,166.482 v1(48.6,167.375) 48.536,167.439 48.536,171.486 U3.13
SG_1_P: J1.8 U3.9 | length 43
  Top Layer 1 w0.254: v1(59.433,194.895) 59.46,194.895 60.165,195.6 J1.8
  Bottom Layer w0.254: U3.9 53.675,169.376 57.107,172.808 62.208,172.808 62.792,173.392 62.792,191.536 v1(59.433,194.895)
SG_2_P: J2.8 U3.5 | length 58.4
  Bottom Layer w0.254: U3.5 56.306,167.956 56.306,169.134 57.897,170.725 64.4,170.725 65.076,171.401 65.076,187.989 69.5,192.413 69.5,214.643 J2.8 70.332,215.772 70.041,215.481 69.933,215.481
SG_3_P: J3.8 U3.23 | length 54.5
  Bottom Layer w0.254: J3.8 56.4,218.634 57.548,217.486 57.548,215.065 59.351,213.263 59.351,203.373 56.893,200.914 56.893,183.883 58.225,182.551 U3.23
SG_4_P: J4.8 U3.19 | length 64.8
  Bottom Layer w0.254: J4.8 40.769,226.143 48.723,218.188 53.849,218.188 55.516,216.521 55.516,202.411 54.861,201.756 54.861,183.041 55.625,182.277 U3.19
SG_5_P: J5.8 U9.2 | length 47.5
  Top Layer 1 w0.254: v1(39.304,187.362) 43.974,182.691 v1(45.976,182.691)
  Bottom Layer w0.254: J5.8 39.304,201.696 v1(39.304,187.362) ; v1(45.976,182.691) 45.976,182.639 45.3,181.963 45.3,173.23 45.193,173.123 45.193,171.385 45.447,171.131 46.419,171.131 U9.2
VCC: B2.4 C2.1 U1.1 U4.1 U4.2 U5.1 U5.2 U6.1 U6.2 U7.1 U7.2 U8.1 U8.2 | length 200.7
  Top Layer 1 w1: U8.2 35.692,197.743 35.692,200.892 v1(35.7,200.9) ; U6.2 U6.1 v1@37.805,217.744 ; v1(37.7,217.692) 37.752,217.744 v1@37.805,217.744 ; v1@37.805,218.022 v1@37.805,217.744 ; U7.1 U7.2 43.254,220.584 43.254,219.738 41.916,218.4 40.335,218.4 39.679,217.744 v1@37.805,217.744 ; B2.4 68.39,108.11 U1.1 ; U5.2 58.558,219.223 58.558,216.042 v1(58.6,216) ; U4.2 62.558,208.323 62.558,204.742 v1(62.6,204.7)
  Top Layer 1 w2: B2.4 55.402,108.605 61.6,114.803 v4(61.6,120.3)
  PWR w1: v1(35.7,200.9) 35.7,215.936 36.389,216.625 36.389,216.655 36.407,216.673 36.608,216.673 37.627,217.692 v1(37.7,217.692) ; v1@37.446,217.946 37.7,218.2 56.4,218.2 v1(58.6,216) 58.6,208.7 v1(62.6,204.7) 65.571,201.729 65.571,200.192 65.571,195.008 68.7,191.879 68.7,127.4 v4(61.6,120.3)
  Bottom Layer w0.254: C2.1 67.601,105.8 U1.1
VCC_0: J5.1 U8.3 U8.4 | length 6.1
  Top Layer 1 w1: J5.1 31.805,195.195 U8.4 U8.3
VCC_1: J4.1 U6.3 U6.4 | length 8.7
  Top Layer 1 w1: J4.1 28.87,214.616 U6.4 U6.3
VCC_2: J3.1 U7.3 U7.4 | length 7.8
  Top Layer 1 w1: U7.3 U7.4 40.73,224.73 J3.1
VCC_3: J2.1 U5.3 U5.4 | length 5.8
  Top Layer 1 w1.5: U5.3@58.516,220.8 U5.4 58.516,223.458 J2.1
VCC_4: J1.1 U4.3 U4.4 | length 5.9
  Top Layer 1 w1: U4.3 62.516,210.056 ; U4.4 62.516,210.056 ; 65.972,209.6 65.703,209.869 62.703,209.869 62.516,210.056
  Top Layer 1 w1.5: 65.972,209.6 J1.1
pads on no net: B2.5 B2.6 B2.7 B2.8 B2.9 J6.8 P1.1 P1.2 P1.3 P1.4 P1.5 P1.6 P1.7 P1.17 P1.18 P1.19 P2.1 P2.2 P2.3 P2.13 P2.16 P2.17 P2.19 U3.4 U3.8 U3.18 U3.22 U9.23
copper on no net: | length 13.8
  PWR w0.254: 54.9,133.9 55,134 55,134.349 v3@64.388,143.737
  Bottom Layer w0.254: 56.925,167.925 56.956,167.956
  other v3: 63.988,139.3 71.1,139.3 63.988,143.237 71.1,143.237

## Polygon pours and split planes (outlines as drawn)
GND on GND_LAYER "NONET_L-01_P-001" (solid, pour order 1): 73.406,25.4 26.3,25.9 25.5,26.7 25.5,230.6 69.2,230.6 72.775,227.025

## Silkscreen, mask and mechanical layers (free items; w line width, h text height)
Top Overlay:
  text "MSIG" at 45.2,227.5 h1 r90
  text "GND" at 47.3,227.5 h1 r90
  text "VCC" at 43.3,227.3 h1 r90
  text "3.3" at 52.8,227.3 h1 r90
  text "SCK" at 54.9,227.2 h1 r90
  text "MAG1" at 50.8,227.1 h1 r90
  text "MAG2" at 48.9,227 h1 r90
  text "DOUT" at 32.8,225.7 h1
  text "DOUT" at 56.9,225.1 h1 r90
  text "VCC" at 62,225.1 h1
  text "SCK" at 32,224.3 h1
  text "MSIG" at 63.5,223.7 h1
  text "3.3" at 30.8,222.9 h1
  text "GND" at 64.8,222.3 h1
  text "MAG1" at 28.1,221.5 h1
  text "MAG2" at 66.1,220.9 h1
  text "MAG2" at 26.6,220.1 h1
  text "MAG1" at 67.4,219.3 h1
  text "GND" at 31.1,218.4 h1
  text "3.3" at 63.8,218.1 h1
  text "MOTOR3" at 29.9,216.7 h1
  text "SCK" at 65.6,216.6 h1
  text "DOUT" at 66.1,215.1 h1
  text "VCC" at 28.9,215 h1
  text "DOUT" at 26.5,209.2 h1
  text "VCC" at 68.1,208.7 h1
  text "SCK" at 27.7,207.4 h1
  text "msig" at 68.3,207.233 h1
  text "3.3" at 27.6,205.4 h1
  text "gnd" at 68.5,205.033 h1
  text "MAG1" at 27,203.4 h1
  text "mag2" at 68.4,203.033 h1
  text "MAG2" at 26.3,201.3 h1
  text "mag1" at 68.3,201.233 h1
  text "GND" at 27.5,199.4 h1
  text "3.3" at 68.1,198.7 h1
  text "MSIG" at 26.6,197.5 h1
  text "sck" at 68.2,196.7 h1
  text "VCC" at 27.3,195.4 h1
  text "dout" at 68.3,194.7 h1
  text "NC" at 27.9,190.2 h1
  text "3.3" at 27.1,188.3 h1
  text "JX" at 27.9,186.3 h1
  text "JY" at 27.9,184.5 h1
  text "JB" at 26.454,182.054 h1.52
  text "ba" at 27.9,180.2 h1
  text "bb" at 27.954,178.454 h1
  text "GND" at 26.7,176.2 h1

## Dimensions
26.929,112.435 to 54.8,112.4 on Top Courtyard

## Text inside footprints (layer, text, board x,y; h text height)
P1: Top Overlay "10" at 51.5,135.97 h1.02 r90; Top Overlay "1" at 51.5,113.62 h1.02 r90; Top Overlay "20" at 51.5,161.37 h1.02 r90
P2: Top Overlay "10" at 30.1,139.95 h1.02 r270; Top Overlay "1" at 30.1,162.3 h1.02 r270; Top Overlay "20" at 30.1,114.55 h1.02 r270